# Altium PCB DAP-PCB.PcbDoc (part 4 of 5)
Units mm, origin at the board's own origin, x right, y up, seen from the top; angles counter-clockwise.
Board outline 54.75 x 54.75 mm, 6 copper layers (L1 (SIG/PWR), L2 (GND), L3 (SIG), L4 (PWR), L5 (GND), L6 (SIG/PWR)), stack 1.65 mm thick; 270 components, 172 nets, 891 pads, 308 vias.
Unrouted connection lines stored in the file: 5.
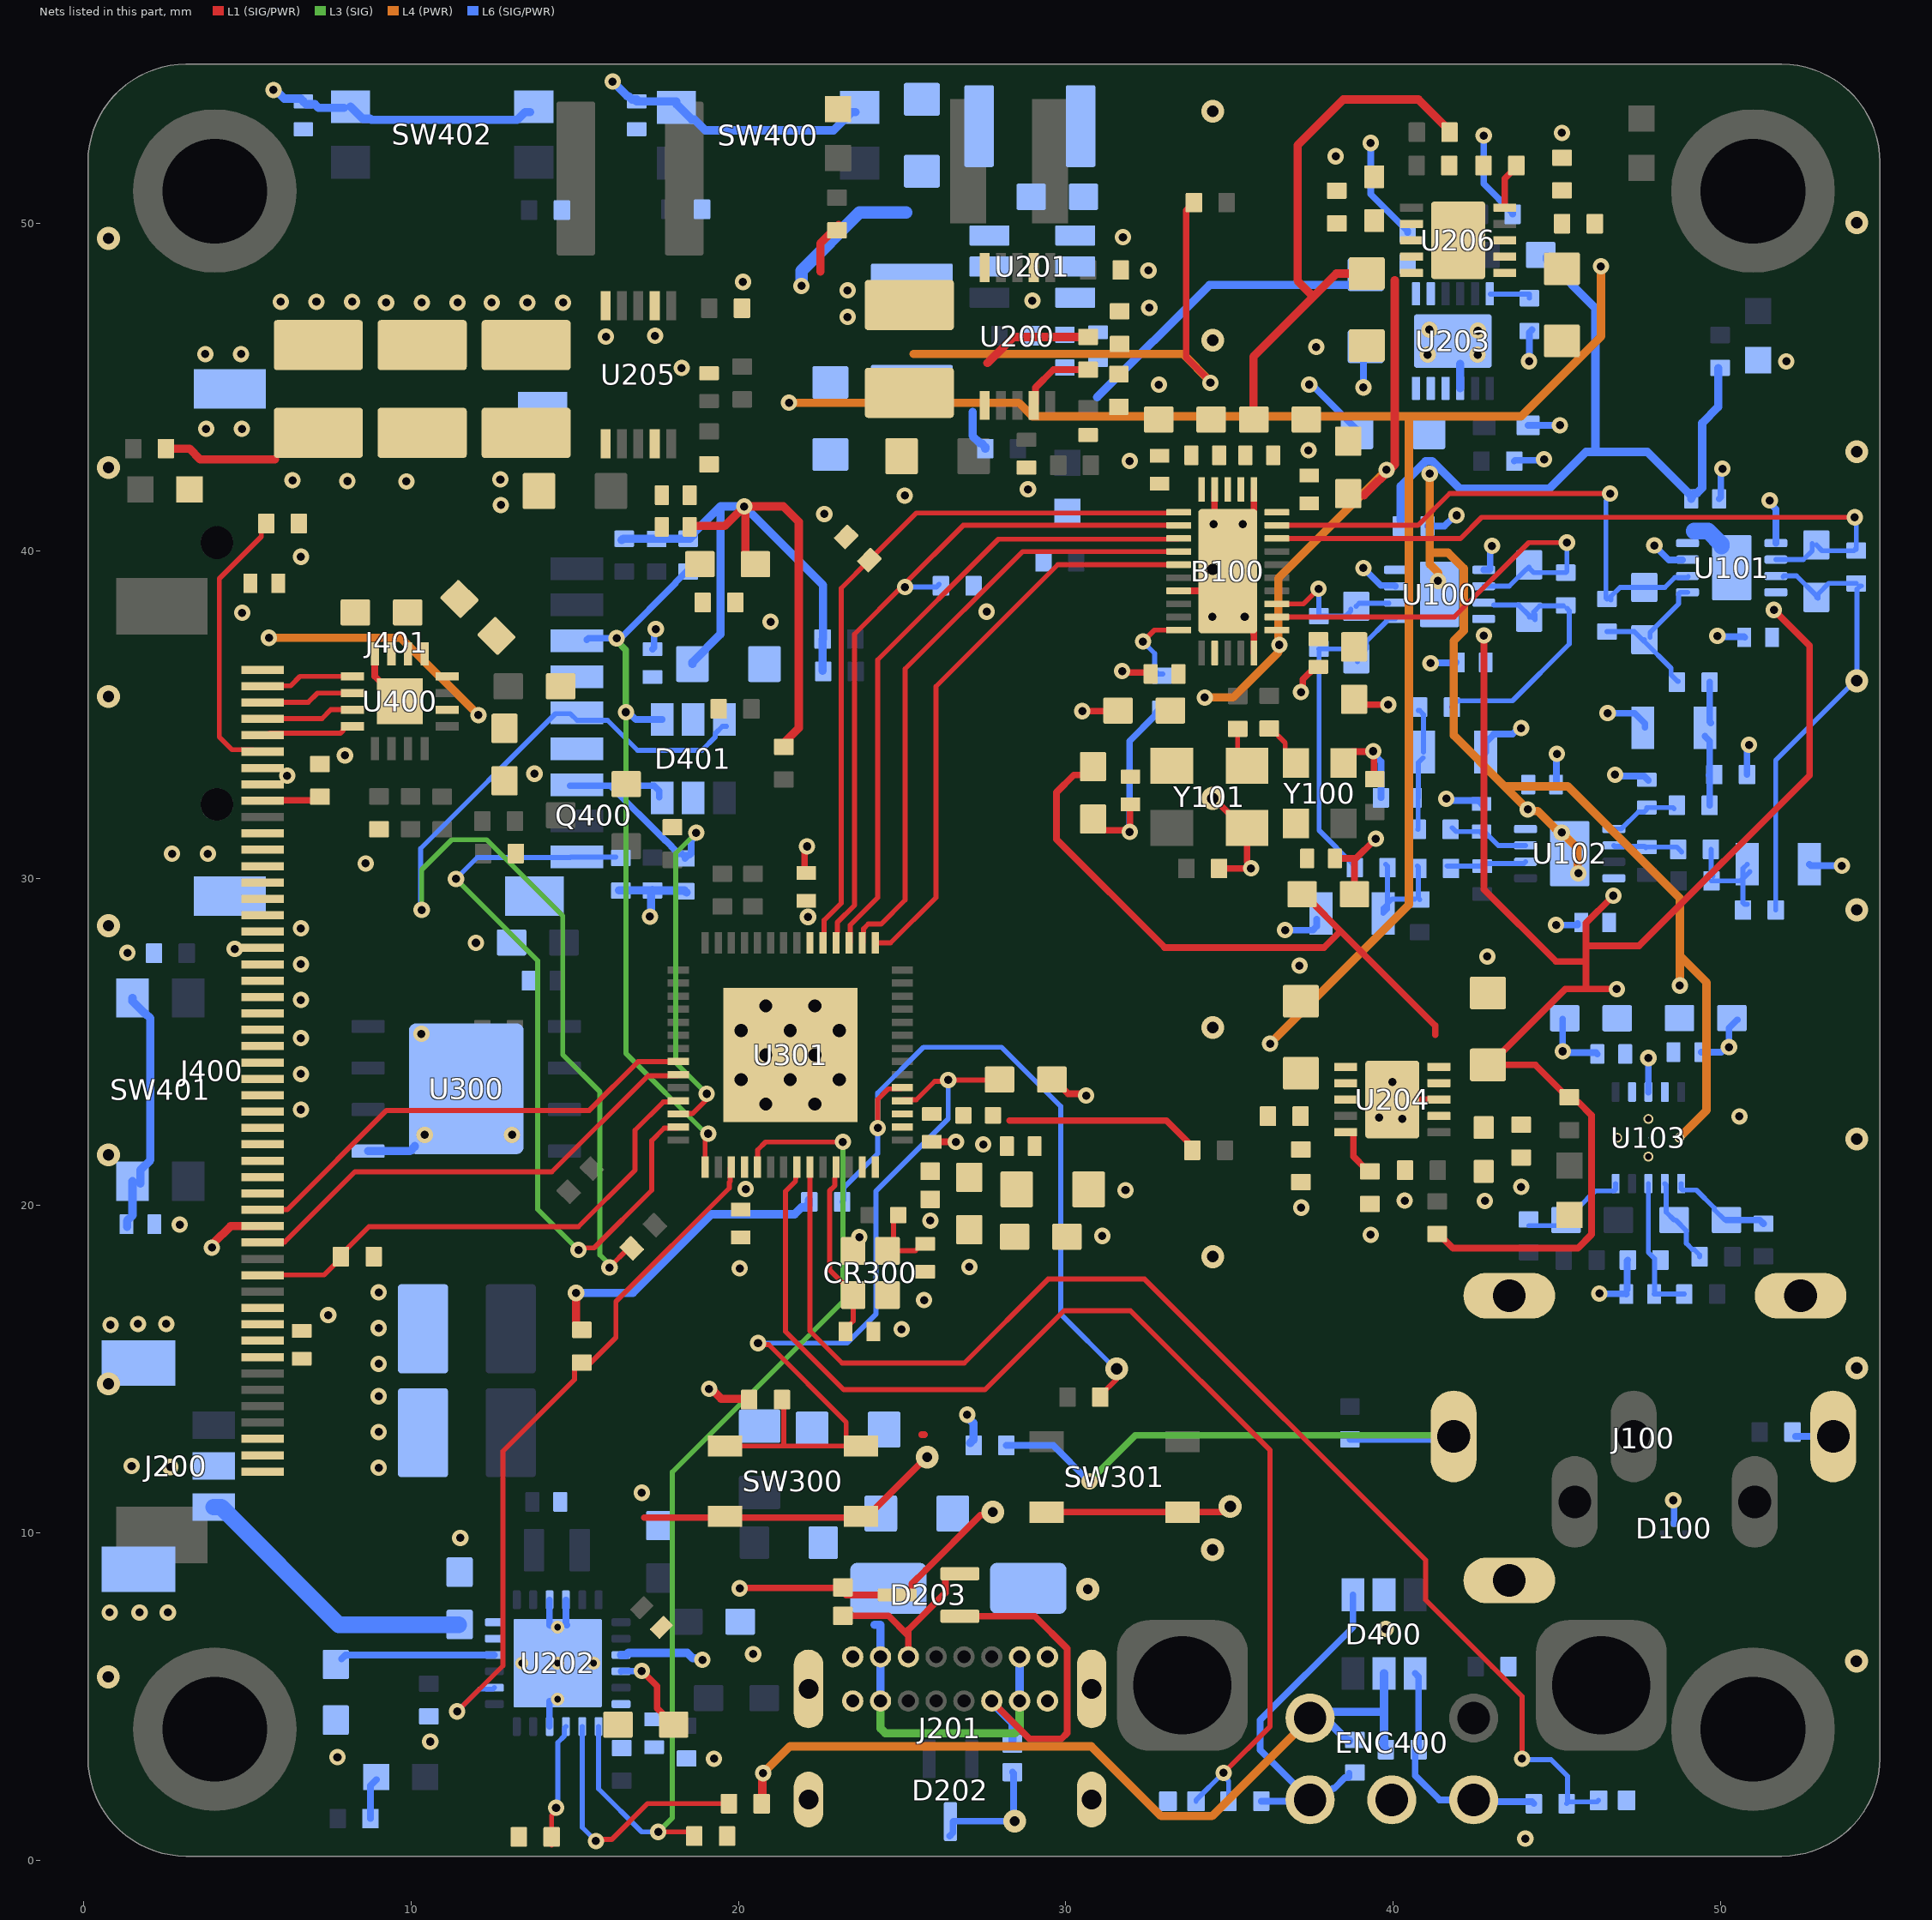
[diagram p6: the nets of this part, all layers, seen from the top]

## Via types
v1: diameter 0.5, hole 0.25, L1 (SIG/PWR) to L6 (SIG/PWR), tented both sides, 268 vias
v2: diameter 0.7, hole 0.35, L1 (SIG/PWR) to L6 (SIG/PWR), tented both sides, 23 vias
v3: diameter 0.7, hole 0.3, L1 (SIG/PWR) to L6 (SIG/PWR), tented both sides, 6 vias
v4: diameter 1.25, hole 0.75, L1 (SIG/PWR) to L6 (SIG/PWR), 6 vias
v5: diameter 0.4/0.4/0.4/0.4/0.4/0.4 (per signal layer), hole 0.2, L1 (SIG/PWR) to L6 (SIG/PWR), tented both sides, 5 vias

## Nets (pads, with @x,y where several pads share a name; then routed paths per layer and width w, separated by ;. In a path a pad name is that pad's centre, name@x,y a point inside that pad or via, vN(x,y) a via of type N, cw(c..) or ccw(c..) an arc to the next point about the centre after c; other vN are vias at no path point) (continued)
GND: (continued)
  other v1: 44.045,0.659 19.253,3.099 7.747,3.15 10.584,3.622 20.448,6.298 39.775,7.063 0.788,7.568 1.702,7.569 2.565,7.569 20.041,8.306 11.501,9.849 48.565,10.998 17.047,11.227 9.006,11.991 2.643,12.013 1.459,12.045 9.006,13.084 9.006,14.176 9.006,15.166 24.986,16.224 9.006,16.259 0.814,16.356 1.651,16.383 2.515,16.383 25.671,17.113 46.305,17.317 9.006,17.351 20.041,18.084 27.055,18.126 23.694,19.038 31.115,19.075 39.319,19.11 2.929,19.42 25.861,19.542 37.193,19.94 40.361,20.152 42.806,20.143 31.827,20.472 43.917,20.574 10.414,22.162 13.081,22.162 40.284,22.657 39.578,22.687 50.586,22.726 6.629,22.933 39.98,23.774 6.629,24.025 47.803,24.511 6.629,25.117 10.312,25.248 6.629,26.286 37.142,27.331 6.629,27.378 42.883,27.611 1.328,27.726 4.609,27.844 11.979,28.03 6.629,28.47 53.717,30.384 8.611,30.455 2.693,30.753 3.786,30.753 41.631,32.436 13.767,33.198 7.976,33.757 45.01,33.802 50.877,34.081 43.918,34.589 17.475,37.617 20.981,37.84 34.478,37.997 35.469,37.997 4.833,38.113 27.584,38.151 39.096,39.483 6.629,39.827 35.408,40.818 41.942,41.091 22.624,41.132 12.74,41.409 51.512,41.549 25.083,41.698 28.846,41.888 12.725,42.189 50.064,42.514 31.955,42.75 44.618,42.803 37.416,43.08 3.735,43.732 4.827,43.732 45.1,43.844 39.097,45.002 32.844,45.086 37.442,45.087 18.263,45.593 52.019,45.796 3.709,46.018 4.802,46.018 41.062,46.003 42.586,46.003 37.655,46.237 15.952,46.553 17.451,46.578 42.596,46.736 41.113,46.765 23.334,47.153 32.554,47.433 9.233,47.592 10.325,47.592 11.418,47.592 12.459,47.592 13.551,47.592 14.643,47.592 6.013,47.619 7.105,47.619 8.197,47.619 28.981,47.65 23.334,47.966 20.138,48.226 32.529,48.576 31.748,49.592 38.251,52.062 39.318,52.469 42.773,52.697 45.161,52.781
  other v2: 0.746,5.6 54.162,6.082 34.486,9.487 35.026,10.807 0.752,14.554 54.168,15.037 34.493,18.442 54.168,22.037 34.493,25.442 0.752,28.554 54.168,29.037 0.752,35.554 34.493,39.442 0.752,42.554 54.168,43.037 34.493,46.442 0.753,49.554 54.169,50.036 34.493,53.442
  other v3: 28.443,1.193 30.673,8.282 27.775,10.64 25.769,12.317
  other v5: 14.478,4.92 13.378,6.02 14.478,6.02 15.578,6.02 14.478,7.12
GPIO1_DAC: B100.17 R112.2 U301.18 | length 21.9
  L1 (SIG/PWR) w0.152: U301.18@22.984,28.028 23.018,28.061 23.018,28.363 23.02,28.366 23.02,28.653 23.546,29.179 23.546,37.465 25.035,38.954 26.867,40.786 B100.17@33.293,40.786
  L6 (SIG/PWR) w0.152: v1(25.09,38.9) 26.047,38.9 R112.2@26.137,38.989
GPIO2_DAC: B100.16 R113.2 U301.19 | length 22.1
  L1 (SIG/PWR) w0.152: U301.19@22.584,28.028 22.618,28.061 22.618,28.363 22.62,28.366 22.62,28.72 23.139,29.239 23.139,38.866 R113.2@24.001,39.728 25.435,41.162 33.212,41.162 B100.16@33.249,41.199
ILIM_BQ: R217.2 U202.22 | length 2.7
  L1 (SIG/PWR) w0.203: v1(17.047,5.781) 17.056,5.781 17.516,5.321 17.516,4.645 17.672,4.489 17.672,4.439 17.97,4.14 R217.2@18.02,4.14
  L6 (SIG/PWR) w0.203: U202.22@16.413,5.77 16.418,5.775 17.042,5.775 v1(17.047,5.781)
ILIM_DAC_LDO+: R246.2 U206.5 | length 1.5
  L1 (SIG/PWR) w0.203: U206.5@43.417,50.496 43.417,51.379 43.815,51.778 R246.2@43.815,51.841
ILIM_LDO+: R229.2 U204.5 | length 1.6
  L1 (SIG/PWR) w0.203: U204.5@38.555,22.241 38.765,22.241 38.788,22.217 38.788,21.504 39.16,21.133 R229.2@39.243,21.133
ILIM_LDO-: R230.2 U203.6 | length 1.3
  L6 (SIG/PWR) w0.152: U203.6@42.977,47.854 44.171,47.854 R230.2@44.171,47.727
IM0: J400.6 R402.2 | length 8.3
  L1 (SIG/PWR) w0.152: J400.6@5.207,33.883 5.158,33.932 4.524,33.932 4.14,34.316 4.14,39.16 5.422,40.441 5.422,40.804 R402.2@5.436,40.818
IM3: J400.9 R403.2 | length 1.9
  L1 (SIG/PWR) w0.203: J400.9@5.207,32.383 R403.2@7.148,32.383
INT_BQ: R210.1 U202.8 U301.45 | length 21.6
  L1 (SIG/PWR) w0.152: v1(11.405,4.547) 12.802,5.944 12.802,12.497 14.991,14.686 14.991,15.031 15.165,15.205 R210.1@15.215,15.205 ; R210.1@15.38,15.09 16.257,15.968 16.257,17.07 19.72,20.533 19.72,20.714 19.75,20.744 19.75,21.144 U301.45@19.784,21.178
  L6 (SIG/PWR) w0.152: v1(11.405,4.547) 12.084,5.226 12.499,5.226 U202.8@12.543,5.27
ISET_BQ: R218.2 U202.10 | length 4.7
  L6 (SIG/PWR) w0.203: R218.2@7.874,6.147 7.874,6.149 7.995,6.27 U202.10@12.543,6.27
IV_L: C107.1 R103.2 R116.1 U101.7 | length 13.8
  L6 (SIG/PWR) w0.152: R116.1@51.695,29.032 51.695,33.61 54.178,36.093 54.178,38.839 54.278,38.938 R103.2@54.305,38.938 ; U101.7@51.918,39.218 51.941,39.241 52.331,39.241 52.937,38.636 C107.1@52.937,38.586 ; C107.1@52.984,38.557 52.984,38.683 53.314,39.013 R103.2@54.156,39.013
  other v2: 54.168,36.037
IV_LB: C101.1 R101.2 R123.1 U101.1 | length 4.9
  L6 (SIG/PWR) w0.152: R101.2@46.536,37.54 47.373,37.54 C101.1@47.65,37.262 ; C101.1@47.679,37.29 47.679,37.24 48.5,36.419 48.5,36.216 48.699,36.017 R123.1@48.717,36.017 ; C101.1@47.854,37.363 47.854,37.515 48.727,38.388 48.727,38.692 48.776,38.741 U101.1@49,38.741
IV_R: C100.1 R100.2 R121.1 U100.1 | length 10.2
  L6 (SIG/PWR) w0.152: R100.2@37.735,37.012 38.554,37.012 C100.1@38.841,36.725 ; R100.2@37.744,36.932 37.744,31.467 38.833,30.378 R121.1@38.833,30.328 ; C100.1@38.878,36.762 C100.1@38.878,36.712 39.189,37.023 39.189,37.242 39.798,37.851 39.798,37.878 39.847,37.927 U100.1@40.072,37.927 ; C100.1@38.913,36.627 C100.1@38.913,36.653
IV_RB: C106.1 R102.2 R131.1 U100.7 | length 8.2
  L6 (SIG/PWR) w0.152: R131.1@41.8,35.23 41.8,35.25 41.974,35.424 43.653,35.424 45.39,37.16 45.39,38.176 R102.2@45.314,38.252 ; U100.7@43.078,38.354 43.837,38.354 44.161,38.03 C106.1@44.161,37.982 44.262,37.982 44.34,37.904 44.34,38.057 44.298,38.1 44.298,38.137 44.485,38.325 R102.2@45.208,38.325
JACK_DET: J100.4 R118.1 R119.2 | length 17.9
  L3 (SIG) w0.203: v1(30.727,11.579) 32.128,12.979 J100.4@41.758,12.979
  L6 (SIG/PWR) w0.203: R118.1@28.186,12.675 29.616,12.675 v1@30.683,11.608 ; R119.2@38.684,12.86 41.885,12.86 J100.4@41.885,12.725
LDO_BQ: C214.2 R214.2 U202.24
LED1: J400.2 U400.13 | length 3.1
  L1 (SIG/PWR) w0.152: J400.2@5.207,35.883 6.317,35.883 6.604,36.17 U400.13@8.23,36.17
LED2: J400.3 U400.14 | length 3.1
  L1 (SIG/PWR) w0.152: J400.3@5.207,35.383 6.859,35.383 7.137,35.662 U400.14@8.179,35.662
LED3: J400.4 U400.15 | length 3.1
  L1 (SIG/PWR) w0.152: J400.4@5.207,34.883 7.273,34.883 7.544,35.154 U400.15@8.204,35.154
LED4: J400.5 U400.16 | length 2.7
  L1 (SIG/PWR) w0.152: J400.5@5.639,34.392 5.679,34.432 7.836,34.432 7.925,34.521 7.925,34.597 7.974,34.646 U400.16@8.204,34.646
LEFT_EAR: C138.1 R127.1 U103.7 | length 2.7
  L6 (SIG/PWR) w0.152: U103.7@48.304,20.673 48.348,20.629 48.348,19.799 C138.1@48.589,19.558 ; C138.1@48.639,19.558 48.963,19.234 48.963,18.849 49.148,18.664 49.198,18.664 49.372,18.49 R127.1@49.372,18.44
MISO_LCD: J400.33
MOSI_LCD: J400.34 U301.36 | length 14.8
  L1 (SIG/PWR) w0.152: J400.34@5.207,19.883 6.218,19.883 9.246,22.911 15.443,22.911 16.935,24.403 U301.36@18.159,24.403
NetC118_2: C118.2 R122.2 U102.2 | length 2.4
  L6 (SIG/PWR) w0.152: R122.2@41.656,30.378 41.663,30.372 C118.2@42.729,30.372 ; C118.2@42.723,30.404 42.775,30.456 44.001,30.456 U102.2@44.05,30.505
NetC123_2: C123.2 R120.2 U102.6 | length 2.1
  L6 (SIG/PWR) w0.152: U102.6@46.75,31.005 46.775,30.981 47.683,30.981 C123.2@47.727,30.937 ; C123.2@47.758,30.956 48.673,30.956 R120.2@48.819,30.81
NetC124_2: C124.2 R117.1 U103.10 | length 3.3
  L6 (SIG/PWR) w0.152: R117.1@44.157,19.39 45.119,19.39 C124.2@45.287,19.558 45.337,19.558 45.661,19.882 45.661,19.932 46.178,20.449 46.76,20.449 46.804,20.493 U103.10@46.804,20.673
NetC127_2: C127.2 R115.1 R116.2 R120.1 | length 3.5
  L6 (SIG/PWR) w0.152: R120.1@49.714,30.886 49.723,30.878 49.723,30.135 R115.1@49.784,30.074 ; R115.1@49.731,29.921 50.622,29.921 C127.2@50.902,30.201 ; C127.2@50.821,30.429 50.695,30.303 50.695,29.256 50.741,29.21 R116.2@50.825,29.21
NetC130_2: C130.2 R114.1 R121.2 R122.1 | length 3.9
  L6 (SIG/PWR) w0.152: R121.2@39.776,30.429 39.833,30.372 C130.2@39.833,29.221 ; R114.1@40.665,29.362 39.975,29.362 C130.2@39.833,29.221 ; R122.1@40.742,30.378 40.775,30.345 40.775,29.397 R114.1@40.818,29.354 ; C130.2@39.833,29.221 39.701,29.088 C130.2@39.701,28.927 39.833,29.06 C130.2@39.833,29.221
NetC131_2: C131.2 R123.2 R124.1 R126.2 | length 3.4
  L6 (SIG/PWR) w0.203: C131.2@49.53,34.341 49.674,34.196 R126.2@49.674,33.198 ; R126.2@49.657,33.147 49.675,33.129 R124.1@49.676,32.233 ; R123.2@49.674,35.992 49.674,34.781 C131.2@49.708,34.747
NetC132_1: C132.1 R124.2 U102.5 | length 2.1
  L6 (SIG/PWR) w0.152: U102.5@46.75,31.505 46.975,31.505 47.496,32.027 47.673,32.027 C132.1@47.752,32.106 ; C132.1@47.753,32.163 48.558,32.163 R124.2@48.59,32.131
NetC133_2: C133.2 R108.2 R128.2 U103.8 | length 4.4
  L6 (SIG/PWR) w0.152: U103.8@47.804,20.673 47.804,18.569 47.995,18.378 47.995,17.312 C133.2@47.981,17.297 R128.2@48.903,17.297
NetC136_2: C136.2 R131.2 R132.1 R133.2 | length 3.6
  L6 (SIG/PWR) w0.152: R132.1@40.761,31.496 40.768,31.503 R133.2@40.768,32.486 ; R131.2@40.767,35.128 40.812,35.128 40.935,35.006 C136.2@40.935,33.858 ; R133.2@40.775,32.461 40.775,33.536 C136.2@40.919,33.68
NetC137_1: C137.1 R132.2 U102.3 | length 2.4
  L6 (SIG/PWR) w0.152: R132.2@41.808,31.547 41.929,31.427 C137.1@42.708,31.427 ; C137.1@42.708,31.369 42.854,31.369 43.217,31.005 U102.3@44.05,31.005
NetC138_2: C138.2 R134.1 U103.6 | length 3.1
  L6 (SIG/PWR) w0.152: U103.6@48.804,20.673 48.804,20.523 48.848,20.479 49.269,20.479 49.815,19.932 49.815,19.882 50.139,19.558 C138.2@50.189,19.558
  L6 (SIG/PWR) w0.203: C138.2@50.189,19.558 51.21,19.558 R134.1@51.32,19.448
NetC201_1: C201.1 L202.1 U201.5
NetC201_2: C201.2 L201.2 U201.1
NetC205_1: C205.1 R201.1 R204.2 U201.3
NetC212_1: C212.1 R213.1
NetC219_2: C219.2 D201.A FB200.1 J201.A4 J201.A9 J201.B4 J201.B9 | length 9.9
  L3 (SIG) w0.254: J201.B9@24.342,4.864 24.342,4.026 24.491,3.878 28.443,3.878 28.592,4.026 J201.B4@28.592,4.864
  L6 (SIG/PWR) w0.254: 24.155,7.188 24.342,7.188 J201.A4@24.342,6.214 ; J201.A4@24.308,6.147 24.342,6.113 J201.B9@24.342,4.864 ; J201.B4@28.592,4.864 28.592,6.138 J201.A9@28.702,6.248
NetC221_2: C221.2 R227.1
NetC223_1: C223.1 R233.2 U204.7
NetC226_2: C226.2 R238.2
NetC233_1: C233.1 R248.2 U206.7
NetC302_2: C302.2 L300.1 U301.2 U301.3
NetC404_2: C404.2 R400.2 U301.50 | length 36.1
  L1 (SIG/PWR) w0.152: U301.50@21.784,21.178 21.75,21.144 21.75,20.842 21.748,20.839 21.748,20.747 21.438,20.437 21.438,16.154 23.216,14.376 27.534,14.376 29.947,16.789 31.979,16.789 36.246,12.522 36.246,4.089 v1(34.823,2.667)
  L6 (SIG/PWR) w0.152: C404.2@33.983,1.803 33.983,1.833 34.817,2.667 v1(34.823,2.667) 34.823,2.573 34.976,2.421 R400.2@34.976,1.803
NetC405_2: C405.2 R408.1 U301.51 | length 39.6
  L1 (SIG/PWR) w0.152: U301.51@22.184,21.178 22.184,16.17 23.165,15.189 26.899,15.189 29.464,17.755 32.41,17.755 40.996,9.169 40.996,7.95 43.028,5.918 43.943,5.003 43.943,3.123 v1@44.018,3.048
  L6 (SIG/PWR) w0.152: v1@44.009,3.073 44.831,3.073 45.336,2.569 R408.1@45.336,1.757 ; R408.1@45.306,1.727 R408.1@45.336,1.757 ; C405.2@46.281,1.829 46.231,1.779 45.358,1.779 R408.1@45.336,1.757
  other v1: 43.943,3.1
NetC410_1: C410.1 U400.8
NetC410_2: C410.2 U400.9
NetC411_1: C411.1 U400.11
NetC411_2: C411.2 U400.10
NetD200_A: D200.A R206.1 | length 1.3
  L6 (SIG/PWR) w0.203: R206.1@8.755,1.27 8.755,2.278 D200.A@8.941,2.464
NetD203_1: D203.1 J201.B5 R234.2 | length 10.8
  L1 (SIG/PWR) w0.203: D203.1@26.766,7.453 29.058,7.453 30.046,6.465 30.046,3.884 29.87,3.708 28.893,3.708 27.699,4.902 J201.B5@27.686,4.902
  L6 (SIG/PWR) w0.254: J201.B5@27.813,4.928 27.813,4.752 28.372,4.194 R234.2@28.372,3.559
NetD203_2: D203.2 J201.A5 R235.2 | length 5.5
  L1 (SIG/PWR) w0.203: R235.2@23.216,7.417 23.263,7.464 24.585,7.464 25.192,6.858 ; J201.A5@25.192,6.214 25.192,6.858 ; D203.2@26.594,8.738 26.406,8.738 26.323,8.654 26.323,8.17 25.192,7.039 25.192,6.858